# EAGLE board DIGISPARK_PRODUCTION_REV3-seperated pins (EAGLE 8.0.0)
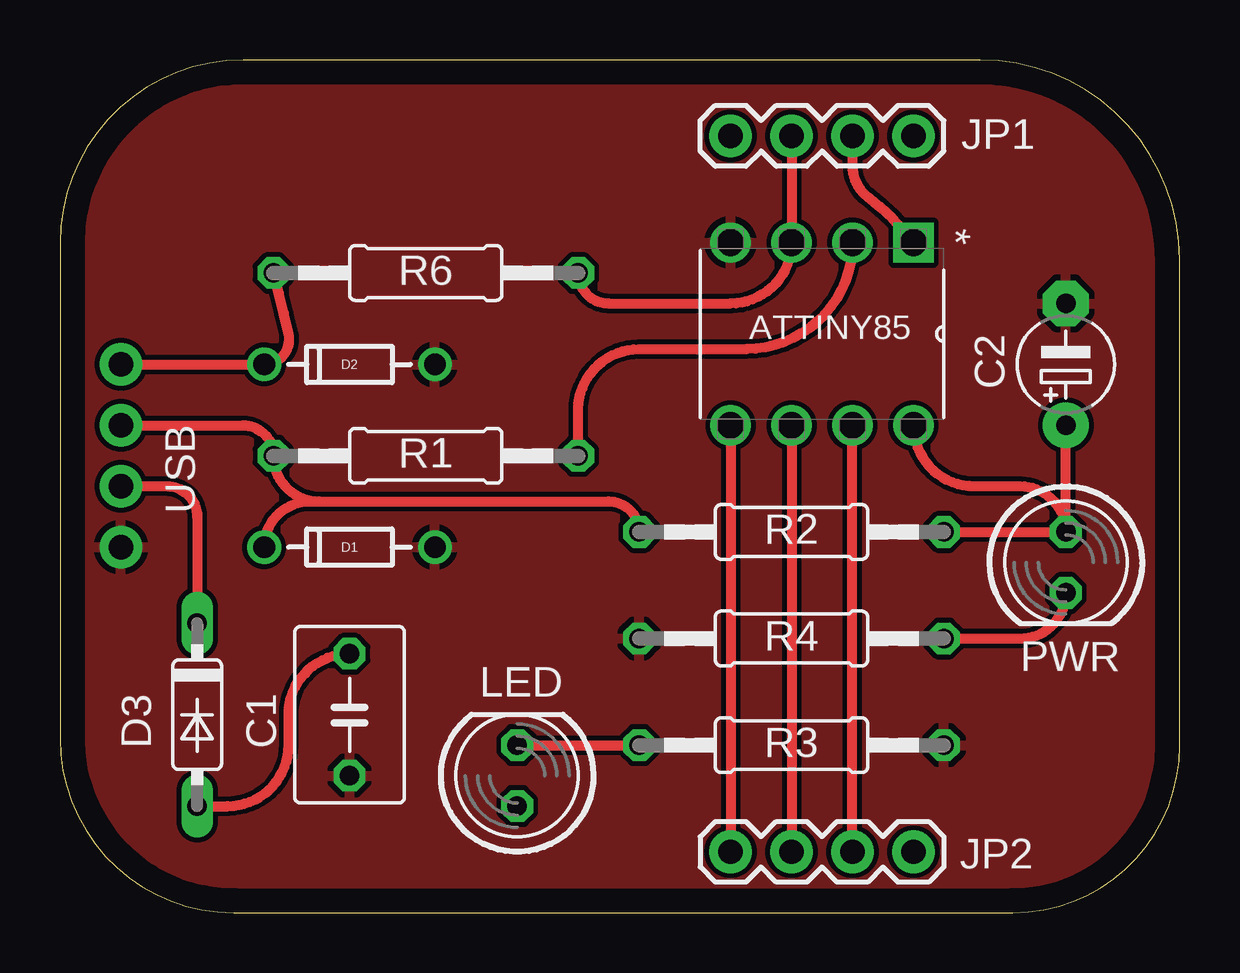
[diagram p0: board, top side]
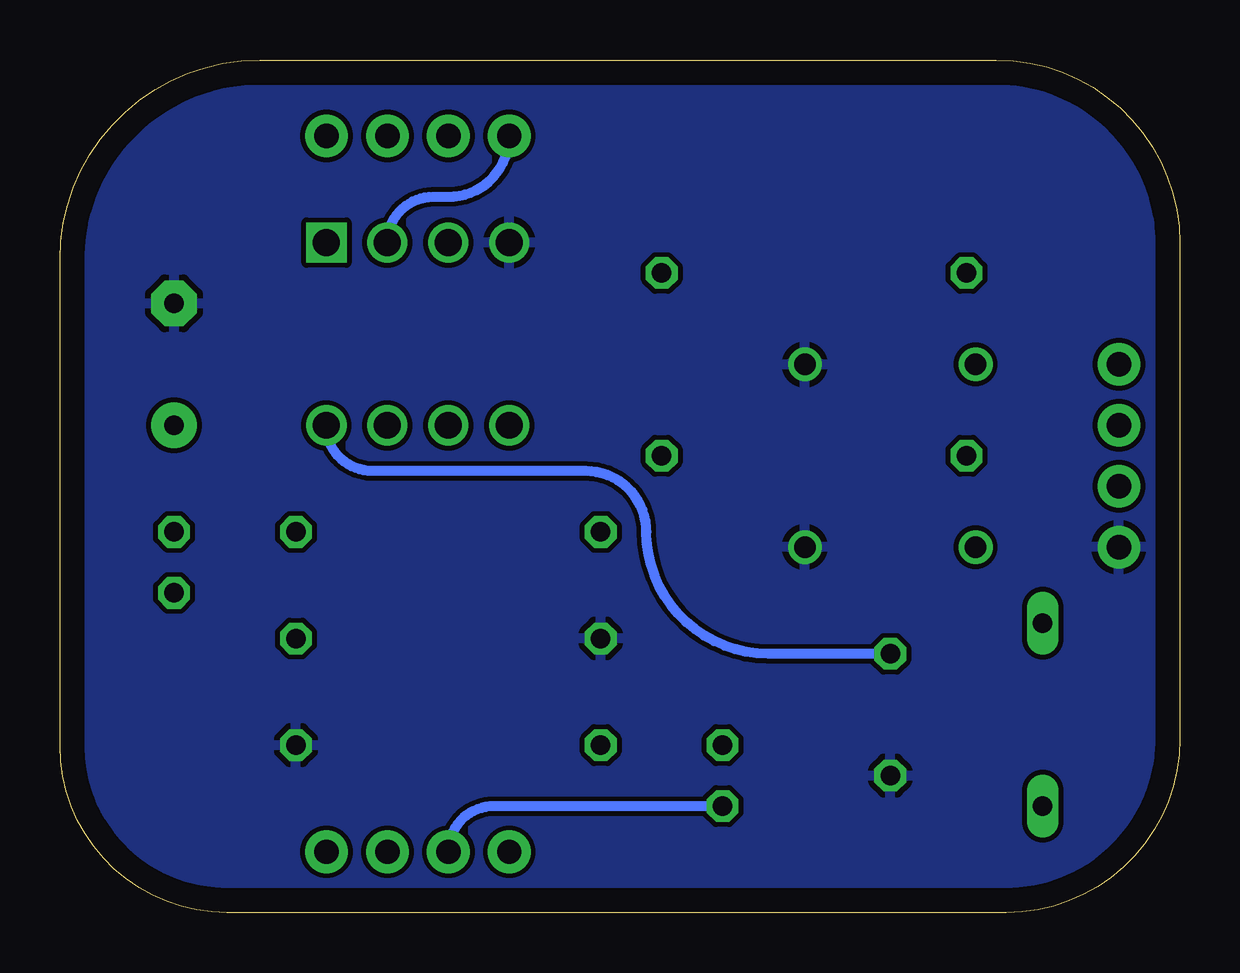
[diagram p1: board, bottom side, seen from below]

Size 46.66 x 35.55 mm. Coordinates in mm from the lower left corner, seen from the top.
Outline: 0,27.91 0,7.24 arc90 7.24,0 39.7,0 arc90 46.66,6.96 46.66,27.23 arc90 38.34,35.55 7.64,35.55 arc90 0,27.91
Copper layers (1*16): Top 0.035mm / dielectric 1.5mm / Bottom 0.035mm
Design rules "default": minimum track width 10mil, minimum drill 24mil, track to track 8mil, track to pad 8mil, pad to pad 8mil, via to via 8mil, smd to smd 8mil, copper to edge 40mil, drill to drill 8mil, minimum pad ring 10mil, minimum via ring 8mil, stop-mask expansion 4mil, vias tented up to drill 0mil, thermal gap 10mil

## Footprints (pad centres in the part's own frame; a part is rotated, then mirrored left to right if it is on the bottom)
DIP254P762X533-8 = drill 1.118 square: 1 -7.62,7.62 | drill 1.118: 2 -7.62,5.08; 3 -7.62,2.54; 4 -7.62,0; 5 0,0; 6 0,2.54; 7 0,5.08; 8 0,7.62
C050-045X075 = drill 0.813 octagon: 1 -2.54,0; 2 2.54,0
E5-4 = drill 0.813 pad 1.905: + -2.54,0 | drill 0.813 pad 1.905 octagon: - 2.54,0
DIODE-ZENER = drill 0.9: P$1 -3.556,0; P$2 3.556,0
DO35-7 = drill 0.813 long: A 3.81,0; C -3.81,0
1X04-BIG = drill 1.016 pad 1.778: 1 0,0; 2 2.54,0; 3 5.08,0; 4 7.62,0
LED5MM = drill 0.813 octagon: A -1.27,0; K 1.27,0
0207/12 = drill 0.813 octagon: 1 -6.35,0; 2 6.35,0
1X04-CLEANBIG = drill 1.016 pad 1.778: 1 -3.81,0; 2 -1.27,0; 3 1.27,0; 4 3.81,0

## Placement (x,y rotation side)
ATTINY85  [DIP254P762X533-8]  27.94,20.32 270 top
C1  0.1uf  [C050-045X075]  12.06,8.26 270 top
C2  4.7uf  [E5-4]  41.91,22.86 90 top
D1  3.6 Zener  [DIODE-ZENER]  12.06,15.24 0 top
D2  3.6 Zener  [DIODE-ZENER]  12.06,22.86 0 top
D3  [DO35-7]  5.71,8.26 270 top
JP1  [1X04-BIG]  35.56,32.38 180 top
JP2  [1X04-BIG]  27.94,2.54 0 top
LED  [LED5MM]  19.05,5.71 90 top
PWR  [LED5MM]  41.91,14.61 270 top
R1  67.5R  [0207/12]  15.24,19.05 0 top
R2  1K5  [0207/12]  30.48,15.88 0 top
R3  150  [0207/12]  30.48,6.99 0 top
R4  150  [0207/12]  30.48,11.43 0 top
R6  67.5R  [0207/12]  15.24,26.67 0 top
USB  [1X04-CLEANBIG]  2.54,19.05 270 top

## Library data of the parts
ATTINY85 = Atmel_By_element14_Batch_1-00; MPN: ATTINY85-20PU; OC_FARNELL: 1455162; OC_NEWARK: 58M3796; PACKAGE: PDIP-8; SUPPLIER: Atmel
C1 C2 R1-R4 R6 = rcl
D1 D2 = Johnboiles
D3 JP1 JP2 = adafruit
LED PWR = led
USB = adafruit; 1: GND; 2: 5V; 3: USB_M; 4: USB_P

## Nets
5V: ATTINY85.8 C1.1 C2.+ D3.A PWR.A R2.2
GND: ATTINY85.4 C1.2 C2.- D1.P$2 D2.P$2 R3.2 R4.1 USB.4
N$1: PWR.K R4.2
N$2: ATTINY85.1 JP1.2
N$3: ATTINY85.5 JP2.1
N$4: LED.K R3.1
N$5: ATTINY85.6 JP2.2 LED.A
N$6: JP2.3
N$10: D1.P$1 R1.1 R2.1 USB.2
N$11: D2.P$1 R6.1 USB.1
N$13: ATTINY85.2 JP1.4 R1.2
N$15: ATTINY85.3 JP1.3 R6.2
N$16: D3.C USB.3

## Tracks (layer width: path | path; a pad name or v marks a point on that pad's centre or on a via)
5V
  Top 0.406: ATTINY85.8 arc90 38.1,17.78 40.01,17.78 arc-90 PWR.A | R2.2 PWR.A | PWR.A C2.+ | D3.A 6.99,4.45 arc90 9.53,6.99 9.53,8.26 arc-90 C1.1
  Bottom 0.406: C1.1 17.14,10.79 arc90 22.23,15.88 arc-90 24.77,18.41 33.66,18.41 arc90 ATTINY85.8
GND
  pour Top: -1.27,36.83 48.26,36.83 48.26,-1.27 -1.27,-1.27
  pour Bottom: -2.54,38.1 49.53,38.1 49.53,-2.54 -2.54,-2.54
N$1
  Top 0.406: R4.2 40.01,11.43 arc90 PWR.K
N$2
  Top 0.406: JP1.2 33.02,31.11 arc53 33.66,29.84 arc-16 ATTINY85.1
N$3
  Top 0.406: ATTINY85.5 JP2.1
N$4
  Top 0.406: LED.K R3.1
N$5
  Top 0.406: ATTINY85.6 JP2.2
  Bottom 0.406: LED.A 28.57,4.45 arc-90 JP2.2
N$6
  Top 0.406: JP2.3 33.02,20.32
N$10
  Top 0.406: 10.79,17.14 arc-90 R1.1 arc90 7.62,20.32 USB.2 | R2.1 arc90 22.86,17.14 10.79,17.14 | D1.P$1 arc-90 10.41,17.14 10.79,17.14
N$11
  Top 0.406: USB.1 D2.P$1 arc103 9.53,24.13 arc3 R6.1
N$13
  Top 0.406: R1.2 21.59,20.96 arc-90 24.13,23.5 28.57,23.5 arc90 ATTINY85.2
  Bottom 0.406: ATTINY85.2 arc90 31.11,29.84 30.48,29.84 arc-90 JP1.4
N$15
  Top 0.406: R6.2 arc90 22.86,25.4 27.94,25.4 arc90 ATTINY85.3 JP1.3
N$16
  Top 0.406: USB.3 4.45,17.78 arc-90 5.71,16.51 D3.C